# EAGLE board 4x4v2 (EAGLE 8.5.0)
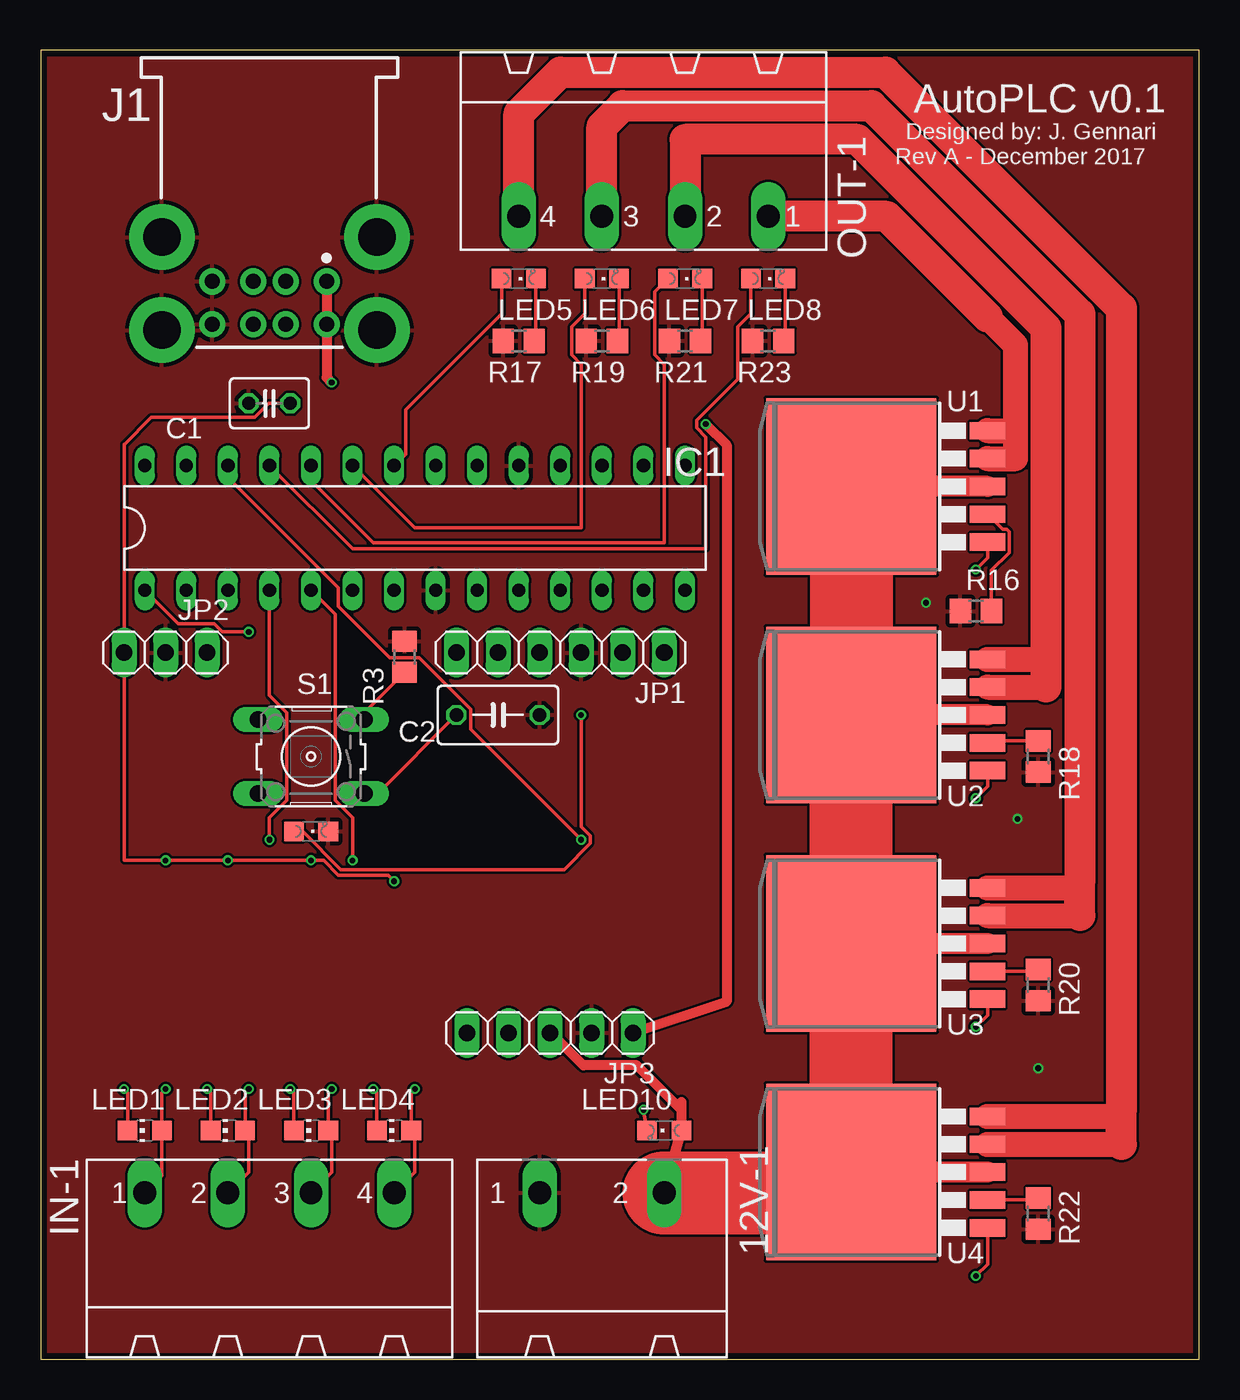
[diagram p0: board, top side]
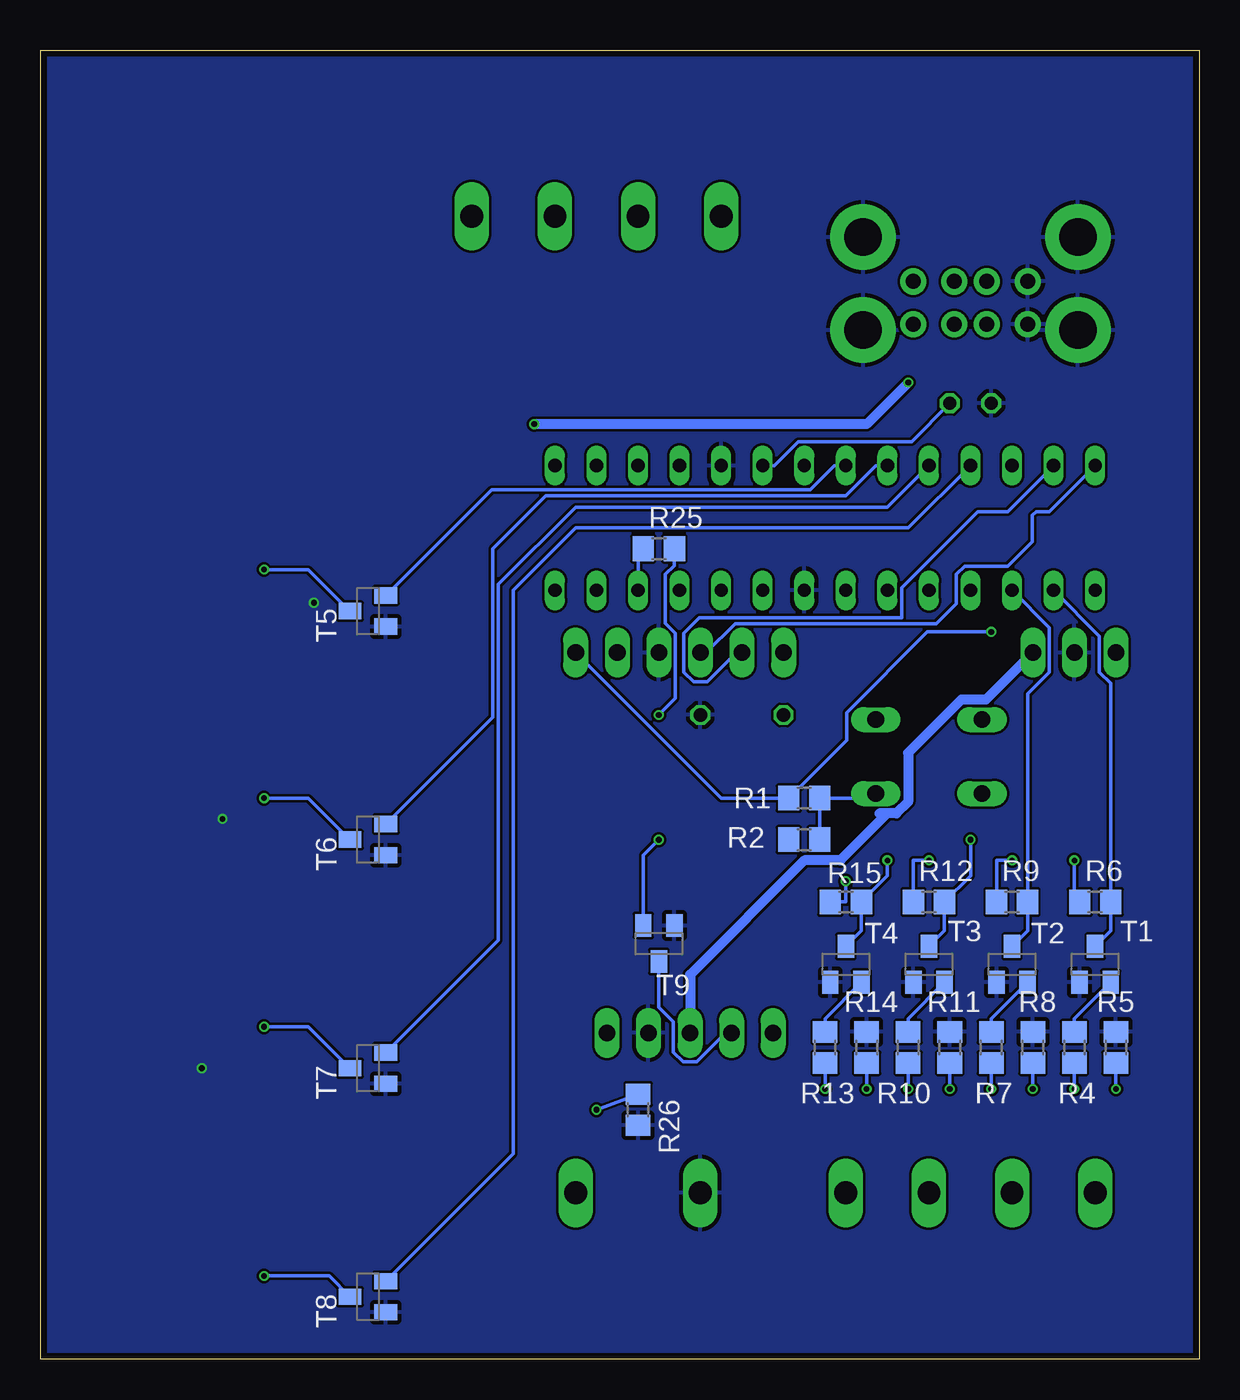
[diagram p1: board, bottom side, seen from below]

Size 70.79 x 80 mm. Coordinates in mm from the lower left corner, seen from the top.
Outline: 0,0 70.79,0 70.79,80 0,80 0,0
Copper layers (1*16): Top 0.035559375mm / dielectric 1.6mm / Bottom 0.035559375mm
Design rules "oshpark-2layer": minimum track width 6mil, minimum drill 10mil, track to track 6mil, track to pad 6mil, pad to pad 6mil, via to via 6mil, smd to smd 6mil, copper to edge 15mil, drill to drill 6mil, minimum pad ring 5mil, minimum via ring 5mil, stop-mask expansion 2.5mil, vias tented up to drill 0mil, thermal gap 10mil
Net classes: 0 default: width 0.203 mm, drill 0.305 mm; 1 pwr: width 0.559 mm, drill 0.305 mm

## Footprints (pad centres in the part's own frame; a part is rotated, then mirrored left to right if it is on the bottom)
GMSTBA2 = drill 1.397 long: 1 -3.81,5.08; 2 3.81,5.08
C025-030X050 = drill 0.813 octagon: 1 -1.27,0; 2 1.27,0
C050-035X075 = drill 0.813 octagon: 1 -2.54,0; 2 2.54,0
DIL28-3 = drill 0.813 long: 1 -16.51,-3.81; 2 -13.97,-3.81; 3 -11.43,-3.81; 4 -8.89,-3.81; 5 -6.35,-3.81; 6 -3.81,-3.81; 7 -1.27,-3.81; 8 1.27,-3.81; 9 3.81,-3.81; 10 6.35,-3.81; 11 8.89,-3.81; 12 11.43,-3.81; 13 13.97,-3.81; 14 16.51,-3.81; 15 16.51,3.81; 16 13.97,3.81; 17 11.43,3.81; 18 8.89,3.81; 19 6.35,3.81; 20 3.81,3.81; 21 1.27,3.81; 22 -1.27,3.81; 23 -3.81,3.81; 24 -6.35,3.81; 25 -8.89,3.81; 26 -11.43,3.81; 27 -13.97,3.81; 28 -16.51,3.81
MSTBA4 = drill 1.397 long: 1 -7.62,5.08; 2 -2.54,5.08; 3 2.54,5.08; 4 7.62,5.08
GCT_USB1035-XX-X-X-X-B_REVE = drill 0.92 pad 1.6: 1A -3.5,5.33; 1B -3.5,2.71; 2A -1,5.33; 2B -1,2.71; 3A 1,5.33; 3B 1,2.71; 4A 3.5,5.33; 4B 3.5,2.71 | drill 2.3 pad 4: 9 -6.57,0; 10 6.57,0; 11 -6.57,5.68; 12 6.57,5.68
1X06 = drill 1.016 long: 1 -6.35,0; 2 -3.81,0; 3 -1.27,0; 4 1.27,0; 5 3.81,0; 6 6.35,0
1X03 = drill 1.016 long: 1 -2.54,0; 2 0,0; 3 2.54,0
1X05 = drill 1.016 long: 1 -5.08,0; 2 -2.54,0; 3 0,0; 4 2.54,0; 5 5.08,0
CHIP-LED0805 = smd 1.2 x 1.2: A 0,-1.05; C 0,1.05
CHIPLED_0805 = smd 1.2 x 1.2: A 0,-1.05; C 0,1.05
R0805 = smd 1.3 x 1.5: 1 -0.95,0; 2 0.95,0
B3F-10XX = drill 1.016 long: 1 -3.251,2.261; 2 3.251,2.261; 3 -3.251,-2.261; 4 3.251,-2.261
SOT23-EBC = smd 1 x 1.4: B 0.95,-1.1; C 0,1.1; E -0.95,-1.1
TO263-5 = smd 1.067 x 2.159: 1 -3.404,-5.791; 2 -1.702,-5.791; 3 0,-5.791; 4 1.702,-5.791; 5 3.404,-5.791 | smd 10.8 x 10.41: 6 0,2.54

## Placement (x,y rotation side)
12V-1  GMSTBA2  [GMSTBA2]  34.29,5.08 0 top
C1  [C025-030X050]  13.97,58.42 180 top
C2  [C050-035X075]  27.94,39.37 0 top
IC1  PIC18F2480-I/SP  [DIL28-3]  22.86,50.8 0 top
IN-1  MSTBA4  [MSTBA4]  13.97,5.08 0 top
J1  USB1035-XX-X-X-X-B_REVE  [GCT_USB1035-XX-X-X-X-B_REVE]  13.97,68.58 180 top
JP1  [1X06]  31.75,43.18 180 top
JP2  [1X03]  7.62,43.18 180 top
JP3  [1X05]  31.11,19.94 180 top
LED1  12123  [CHIP-LED0805]  6.35,13.97 90 top
LED2  [CHIP-LED0805]  11.43,13.97 90 top
LED3  [CHIP-LED0805]  16.51,13.97 90 top
LED4  [CHIP-LED0805]  21.59,13.97 90 top
LED5  [CHIPLED_0805]  29.21,66.04 270 top
LED6  [CHIPLED_0805]  34.29,66.04 270 top
LED7  [CHIPLED_0805]  39.37,66.04 270 top
LED8  [CHIPLED_0805]  44.45,66.04 270 top
LED9  STATUS  [CHIPLED_0805]  16.51,32.26 270 top
LED10  [CHIPLED_0805]  38.1,13.97 90 top
OUT-1  MSTBA4  [MSTBA4]  36.83,74.93 180 top
R1  [R0805]  24.13,34.29 0 bottom
R2  [R0805]  24.13,31.75 180 bottom
R3  [R0805]  22.23,42.93 270 top
R4  200k  [R0805]  7.62,19.05 90 bottom
R5  680  [R0805]  5.08,19.05 90 bottom
R6  20k  [R0805]  6.35,27.94 0 bottom
R7  200k  [R0805]  12.7,19.05 90 bottom
R8  680  [R0805]  10.16,19.05 90 bottom
R9  20k  [R0805]  11.43,27.94 0 bottom
R10  200k  [R0805]  17.78,19.05 90 bottom
R11  680  [R0805]  15.24,19.05 90 bottom
R12  20k  [R0805]  16.51,27.94 0 bottom
R13  200k  [R0805]  22.86,19.05 90 bottom
R14  680  [R0805]  20.32,19.05 90 bottom
R15  20k  [R0805]  21.59,27.94 0 bottom
R16  [R0805]  57.15,45.72 0 top
R17  [R0805]  29.21,62.23 0 top
R18  [R0805]  60.96,36.83 90 top
R19  [R0805]  34.29,62.23 0 top
R20  [R0805]  60.96,22.86 90 top
R21  [R0805]  39.37,62.23 0 top
R22  [R0805]  60.96,8.89 90 top
R23  [R0805]  44.45,62.23 0 top
R25  [R0805]  33.02,49.53 0 bottom
R26  [R0805]  34.29,15.24 270 bottom
S1  [B3F-10XX]  16.51,36.83 180 top
T1  BC547  [SOT23-EBC]  6.35,24.13 0 bottom
T2  BC547  [SOT23-EBC]  11.43,24.13 0 bottom
T3  BC547  [SOT23-EBC]  16.51,24.13 0 bottom
T4  BC547  [SOT23-EBC]  21.59,24.13 0 bottom
T5  [SOT23-EBC]  50.8,45.72 90 bottom
T6  [SOT23-EBC]  50.8,31.75 90 bottom
T7  [SOT23-EBC]  50.8,17.78 90 bottom
T8  [SOT23-EBC]  50.8,3.81 90 bottom
T9  [SOT23-EBC]  33.02,25.4 180 bottom
U1  IR3315  [TO263-5]  52.07,53.34 90 top
U2  IR3315  [TO263-5]  52.07,39.37 90 top
U3  IR3315  [TO263-5]  52.07,25.4 90 top
U4  IR3315  [TO263-5]  52.07,11.43 90 top

## Library data of the parts
12V-1 = con-phoenix-762; MF: FARNELL; MPN: 1757242; OC_FARNELL: 3705171; OC_NEWARK: 71C4161
C1 C2 R1-R23 R25 R26 = resistor
IC1 = microchip; MF: MICROCHIP; MPN: PIC18F2480-I/SP; OC_FARNELL: 9321217; OC_NEWARK: 71J7237
IN-1 OUT-1 = con-phoenix-508; MF: FARNELL; MPN: 1757268; OC_FARNELL: 3705195; OC_NEWARK: 71C4163
J1 = USB1035-XX-X-X-X-B_REVE; AVAILABILITY: Warning; DESCRIPTION: Usb Conn, Dual Rcpt, 2.0, 2port, 8pos; MF: Global Connector Technology; MP: USB1035-GF-P-0-B-B; PACKAGE: None; PRICE: 0.47 USD
JP1-JP3 = pinhead
LED1-LED10 = led
S1 = switch-omron; MPN: B3F-1000; OC_FARNELL: 176432; OC_NEWARK: 36M3542
T1-T9 = transistor
U1-U4 = jgennari

## Nets
5V: JP1.2
12V-1 [pwr]: 12V-1.2 JP2.1 JP3.3 LED10.A U1.3 U1.6 U2.3 U2.6 U3.3 U3.6 U4.3 U4.6
EN: JP3.4 T9.C
GND: 12V-1.1 C1.2 C2.2 IC1.8 IC1.19 J1.4A J1.4B J1.9 J1.10 J1.11 J1.12 JP1.3 JP2.2 JP3.2 LED9.C R3.1 R5.2 R8.2 R11.2 R14.2 R16.1 R17.1 R18.1 R19.1 R20.1 R21.1 R22.1 R23.1 R26.2 T1.E T2.E T3.E T4.E T5.E T6.E T7.E T8.E T9.E
IN-1-1: IN-1.1 LED1.A R4.1
IN-1-2: IN-1.2 LED2.A R7.1
IN-1-3: IN-1.3 LED3.A R10.1
IN-1-4: IN-1.4 LED4.A R13.1
MCLR: IC1.1 JP1.1 R1.1
N$1: C2.1 R1.2 R2.1 S1.1
N$2: R3.2 S1.3
N$3: R2.2
N$4: R4.2 T1.B
N$5: LED1.C R5.1
N$6: R7.2 T2.B
N$7: LED2.C R8.1
N$8: R10.2 T3.B
N$9: LED3.C R11.1
N$10: R13.2 T4.B
N$11: LED4.C R14.1
N$12: T5.C U1.1
N$13: R16.2 U1.2
N$14: LED5.C R17.2
N$15: T6.C U2.1
N$16: R18.2 U2.2
N$17: LED6.C R19.2
N$18: T7.C U3.1
N$19: R20.2 U3.2
N$20: LED7.C R21.2
N$21: T8.C U4.1
N$22: R22.2 U4.2
N$23: LED8.C R23.2
N$24: LED9.A R25.2
N$25: LED10.C R26.1
OUT-1-1 [pwr]: OUT-1.1 U1.4 U1.5
OUT-1-2 [pwr]: OUT-1.2 U2.4 U2.5
OUT-1-3 [pwr]: OUT-1.3 U3.4 U3.5
OUT-1-4 [pwr]: OUT-1.4 U4.4 U4.5
OUT-1-5: J1.1A J1.1B JP3.1
PGC: IC1.27 JP1.5
PGD: IC1.28 JP1.4
PGM: JP1.6
SIGIN-1-1: IC1.2 R6.2 T1.C
SIGIN-1-2: IC1.3 R9.2 T2.C
SIGIN-1-3: IC1.4 R12.2 T3.C
SIGIN-1-4: IC1.5 R15.2 T4.C
SIGOUT-1-1: IC1.22 LED5.A T5.B
SIGOUT-1-2: IC1.23 LED6.A T6.B
SIGOUT-1-3: IC1.24 LED7.A T7.B
SIGOUT-1-4: IC1.25 LED8.A T8.B
SIGOUT-1-5: IC1.26 T9.B
STATUS_LED: IC1.12 R25.1
VCC: C1.1 IC1.20 JP2.3 R6.1 R9.1 R12.1 R15.1

## Tracks (layer width: path | path; a pad name or v marks a point on that pad's centre or on a via)
12V-1
  Top 0.61: 12V-1.2 LED10.A 39.15,15.24 | 39.15,15.71 39.15,15.24 | JP3.3 31.17,19.94 33.15,17.96 36.43,17.96 39.15,15.24
  Top 1.27: U1.3 U1.6 | U3.3 U3.6 | U4.3 U4.6 | U2.3 U2.6 49.53,38.1
  Top 5.08: U1.6 49.53,38.1 | 50.8,39.37 49.53,38.1 | 49.53,38.1 U3.6 U4.6 49.53,10.16 12V-1.2
  Bottom 0.61: JP2.1 13.03,40.31 14.53,40.31 17.78,37.06 17.78,34.06 18.49,33.35 19.05,33.35 | 19.05,33.35 19.53,33.35 | 19.05,33.35 21.92,30.48 24.13,30.48 31.11,23.5 JP3.3
EN
  Bottom 0.203: T9.C 33.02,21.5 32.13,20.61 32.13,18.76 31.54,18.16 30.69,18.16 28.92,19.94 JP3.4
GND  (via drill 0.35)
  other vias: 59.69,33.02 60.96,17.78 54.1,46.23
  pour Top: -2.54,82.55 -2.54,-2.54 73.66,-2.54 73.66,82.55
  pour Bottom: -1.27,83.82 -1.27,-1.27 76.2,-1.27 76.2,83.82
IN-1-1  (via drill 0.35)
  Top 0.203: IN-1.1 7.4,11.21 LED1.A 7.4,16.29 v7.62,16.51
  Bottom 0.203: v7.62,16.51 R4.1
IN-1-2  (via drill 0.35)
  Top 0.203: IN-1.2 12.7,11.43 12.7,13.75 LED2.A 12.48,16.29 v12.7,16.51
  Bottom 0.203: v12.7,16.51 R7.1
IN-1-3  (via drill 0.35)
  Top 0.203: IN-1.3 17.78,11.43 17.78,13.75 LED3.A 17.56,16.29 v17.78,16.51
  Bottom 0.203: v17.78,16.51 R10.1
IN-1-4  (via drill 0.35)
  Top 0.203: IN-1.4 22.86,11.43 22.86,13.75 LED4.A 22.64,16.29 v22.86,16.51
  Bottom 0.203: v22.86,16.51 R13.1
MCLR  (via drill 0.35)
  Top 0.203: v12.7,44.45 11.09,44.45 10.58,44.96 8.38,44.96 IC1.1
  Bottom 0.203: JP1.1 29.21,34.29 R1.1 21.54,37.83 21.54,39.51 16.6,44.45 v12.7,44.45
N$1
  Top 0.203: C2.1 20.6,34.57 S1.1
  Bottom 0.203: R2.1 R1.2 20.04,34.29 S1.1
N$2
  Top 0.203: R3.2 19.76,39.51 S1.3
N$4
  Bottom 0.203: T1.B 7.62,20.81 R4.2
N$5  (via drill 0.35)
  Top 0.203: LED1.C 5.3,16.29 v5.08,16.51
  Bottom 0.203: v5.08,16.51 R5.1
N$6
  Bottom 0.203: R7.2 12.7,20.81 T2.B
N$7  (via drill 0.35)
  Top 0.203: LED2.C 10.38,16.29 v10.16,16.51
  Bottom 0.203: v10.16,16.51 R8.1
N$8
  Bottom 0.203: R10.2 17.78,20.81 T3.B
N$9  (via drill 0.35)
  Top 0.203: LED3.C 15.46,16.29 v15.24,16.51
  Bottom 0.203: v15.24,16.51 R11.1
N$10
  Bottom 0.203: R13.2 22.86,20.81 T4.B
N$11  (via drill 0.35)
  Top 0.203: LED4.C 20.54,16.29 v20.32,16.51
  Bottom 0.203: v20.32,16.51 R14.1
N$12  (via drill 0.35)
  Top 0.203: v57.15,48.26 57.86,48.97 U1.1
  Bottom 0.203: T5.C 54.44,48.26 v57.15,48.26
N$13
  Top 0.203: U1.2 58.78,50.72 59.05,50.72 59.2,50.58 59.2,49.3 58.1,48.2 R16.2
N$14
  Top 0.203: LED5.C 30.26,62.23 R17.2
N$15  (via drill 0.35)
  Top 0.203: v57.15,34.29 57.86,35 U2.1
  Bottom 0.203: T6.C 54.44,34.29 v57.15,34.29
N$16
  Top 0.203: R18.2 57.97,37.78 U2.2
N$17
  Top 0.203: LED6.C 35.34,62.23 R19.2
N$18  (via drill 0.35)
  Top 0.203: v57.15,20.32 57.86,21.03 U3.1
  Bottom 0.203: T7.C 54.44,20.32 v57.15,20.32
N$19
  Top 0.203: U3.2 60.85,23.7 R20.2
N$20
  Top 0.203: LED7.C 40.42,62.23 R21.2
N$21  (via drill 0.35)
  Top 0.203: v57.15,5.08 57.86,5.79 U4.1
  Bottom 0.203: T8.C 53.17,5.08 v57.15,5.08
N$22
  Top 0.203: U4.2 60.85,9.73 R22.2
N$23
  Top 0.203: LED8.C 45.5,62.23 R23.2
N$24  (via drill 0.35)
  Top 0.203: LED9.A 16,32.26 18.34,29.92 31.98,29.92 33.58,31.52 33.58,31.98 33.02,32.54 v33.02,39.37
  Bottom 0.203: R25.2 32.07,48.5 32.61,47.96 32.61,44.97 32,44.36 32,40.39 v33.02,39.37
N$25  (via drill 0.35)
  Top 0.203: LED10.C v36.83,15.24
  Bottom 0.203: v36.83,15.24 R26.1
OUT-1-1
  Top 1.524: U1.5 59.17,56.74 59.58,57.15 | 59.58,57.15 59.58,61.98 57.86,63.69 | U1.4 59.58,55.04 59.58,57.15
  Top 1.905: OUT-1.1 51.7,69.85 57.86,63.69
OUT-1-2
  Top 1.524: U2.5 61.44,42.77 61.44,43.18 | U2.4 61.44,41.07
  Top 1.905: 61.44,41.07 61.44,43.18 61.44,63.02 49.91,74.55 39.37,74.55 OUT-1.2
OUT-1-3
  Top 1.524: U3.5 63.5,28.8 63.5,29.21 | U3.4 63.5,27.1
  Top 1.905: OUT-1.3 34.29,75.34 35.56,76.61 50.76,76.61 63.5,63.87 63.5,29.21 63.5,27.1
OUT-1-4
  Top 1.524: U4.5 66.04,14.83 66.04,15.24 | U4.4 66.04,13.13
  Top 1.905: OUT-1.4 29.21,76.13 31.75,78.67 51.61,78.67 66.04,64.24 66.04,15.24 66.04,13.13
OUT-1-5  (via drill 0.35)
  Top 0.61: J1.1B J1.1A 17.47,60 v17.78,59.69 | v40.64,57.15 41.91,55.88 41.91,21.84 JP3.1
  Bottom 0.61: v17.78,59.69 20.32,57.15 v40.64,57.15
PGC
  Bottom 0.203: IC1.27 11.7,51.8 13.53,51.8 18.19,47.15 18.19,45.31 30.55,45.31 31.5,44.36 31.5,42 30.9,41.4 30.06,41.4 28.28,43.18 JP1.5
PGD
  Bottom 0.203: IC1.28 9.16,51.8 9.96,51.8 10.21,51.56 10.21,49.95 11.69,48.46 14.33,48.46 14.83,47.96 14.83,46.17 16.05,44.96 28.36,44.96 30.14,43.18 JP1.4
SIGIN-1-1
  Bottom 0.203: T1.C 5.4,26.18 R6.2 5.4,41.3 6.1,42 6.1,44.2 IC1.2
SIGIN-1-2
  Bottom 0.203: T2.C 10.48,26.18 R9.2 10.48,40.66 9.14,42 9.14,44.7 IC1.3
SIGIN-1-3  (via drill 0.35)
  Top 0.203: v13.97,31.75 13.97,33.08 15.04,34.15 15.04,39.51 13.97,40.58 IC1.4
  Bottom 0.203: T3.C 15.56,26.18 R12.2 13.97,29.53 v13.97,31.75
SIGIN-1-4  (via drill 0.35)
  Top 0.203: v19.05,30.48 19.05,33.08 17.98,34.15 17.98,45.52 IC1.5
  Bottom 0.203: T4.C 20.64,26.18 R15.2 19.05,29.53 v19.05,30.48
SIGOUT-1-1
  Top 0.203: LED5.A 28.16,63.89 22.3,58.03 22.3,55.32 IC1.22
  Bottom 0.203: IC1.22 22.3,54.61 23.77,53.14 43.23,53.14 T5.B
SIGOUT-1-2
  Top 0.203: LED6.A 33.24,63.89 32.44,63.09 32.44,61.38 33.02,60.79 33.02,50.8 22.86,50.8 IC1.23
  Bottom 0.203: T6.B 43.18,39.22 43.18,49.53 39.93,52.78 21.59,52.78 19.76,54.61 IC1.23
SIGOUT-1-3
  Top 0.203: IC1.24 16.51,53.7 20.32,49.89 38.1,49.89 38.1,60.79 37.52,61.38 37.52,65.24 LED7.A
  Bottom 0.203: IC1.24 19.05,52.07 38.1,52.07 42.82,47.35 42.82,25.61 T7.B
SIGOUT-1-4
  Top 0.203: LED8.A 43.4,63.89 42.6,63.09 42.6,59.9 40.08,57.38 40.08,56.92 40.64,56.36 40.64,49.53 19.05,49.53 IC1.25
  Bottom 0.203: IC1.25 17.78,50.8 38.1,50.8 41.91,46.99 41.91,12.55 T8.B
SIGOUT-1-5  (via drill 0.35)
  Top 0.203: v33.02,31.75 26.26,38.51 26.26,39.73 23.11,42.88 21.33,42.88 18.19,46.02 18.19,47.15 11.43,53.9 IC1.26
  Bottom 0.203: v33.02,31.75 33.97,30.8 T9.B
STATUS_LED
  Bottom 0.203: R25.1 34.29,49.21 IC1.12
VCC  (via drill 0.35)
  Top 0.203: v21.59,29.21 21.23,29.57 18.19,29.57 17.28,30.48 v16.51,30.48 v11.43,30.48 v7.62,30.48 5.08,30.48 JP2.3 5.08,55.88 | 5.08,55.93 5.08,55.88 | C1.1 13.92,58.42 13.06,57.56 6.76,57.56 5.08,55.88
  Bottom 0.203: v7.62,30.48 7.62,27.94 R6.1 | v21.59,29.21 21.59,27.94 R15.1 | R12.1 17.46,30.48 v16.51,30.48 | R9.1 12.38,30.48 v11.43,30.48 | IC1.20 25.96,54.61 24.49,56.08 17.58,56.08 C1.1

## Text on the board
tNames: AutoPLC v0.1 | Designed by: J. Gennari | Rev A - December 2017